# Altium PCB PCB1.PcbDoc
Units mil, origin at the board's own origin, x right, y up, seen from the top; angles counter-clockwise.
Board outline 950 x 1100 mil, 2 copper layers (Top Layer, Bottom Layer); 14 components, 22 nets, 68 pads, 7 vias.
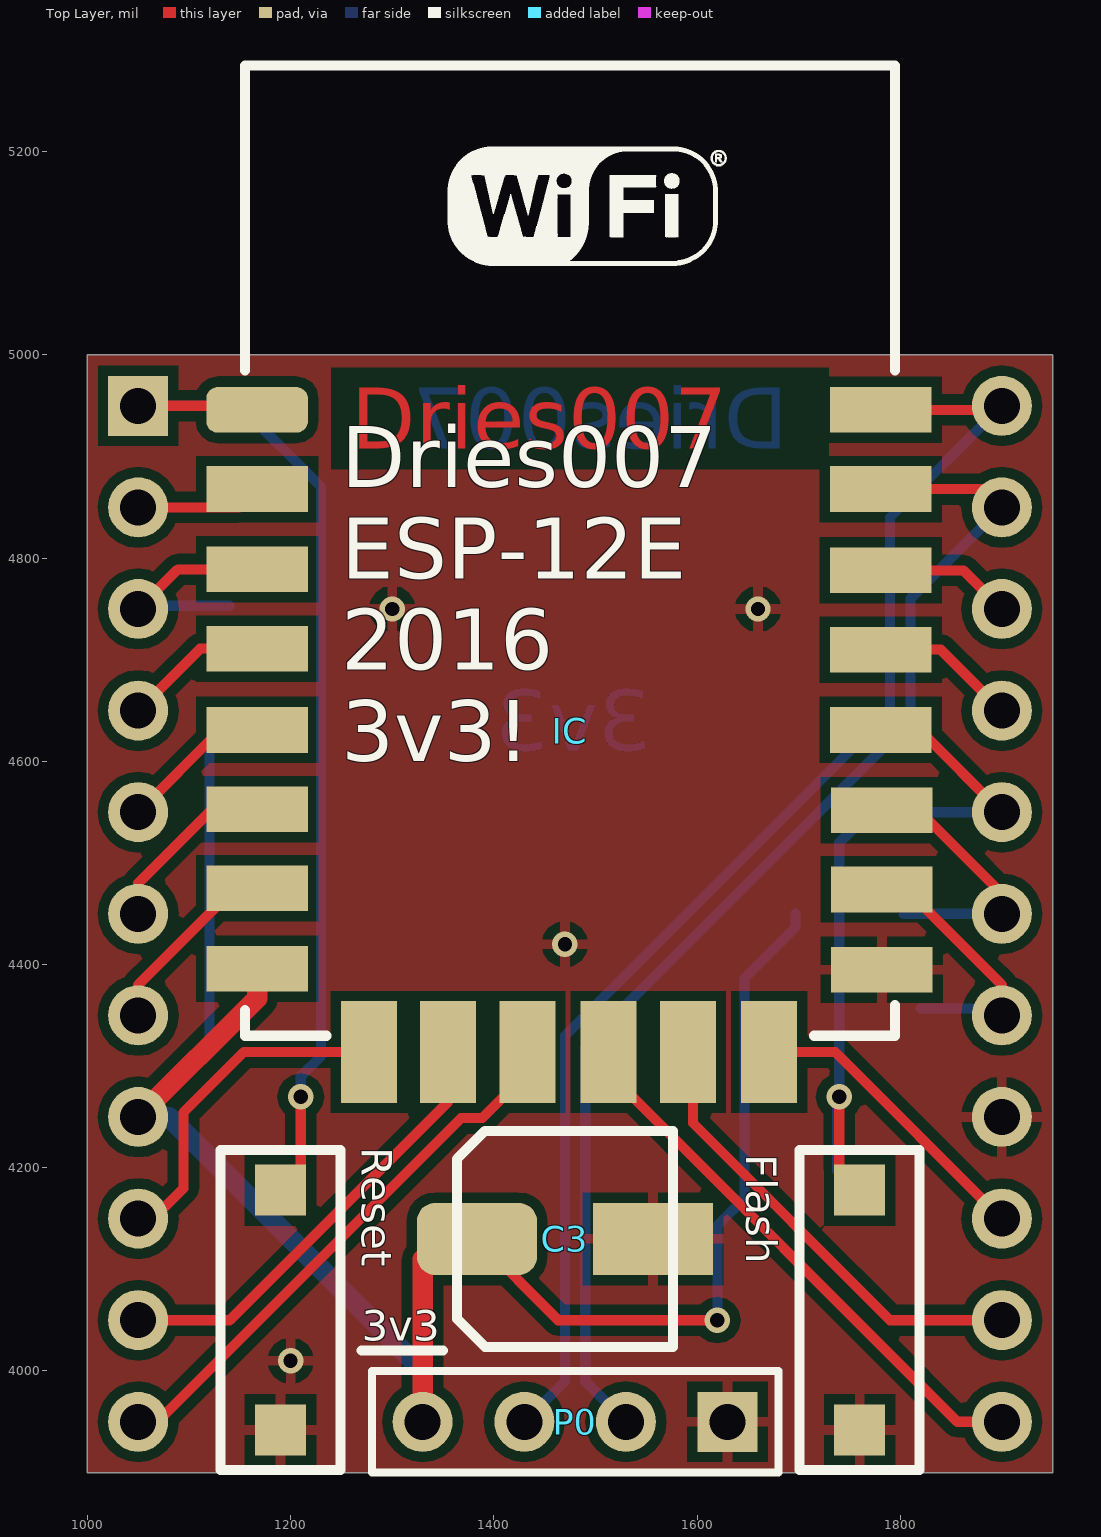
[diagram p0: Top Layer view]
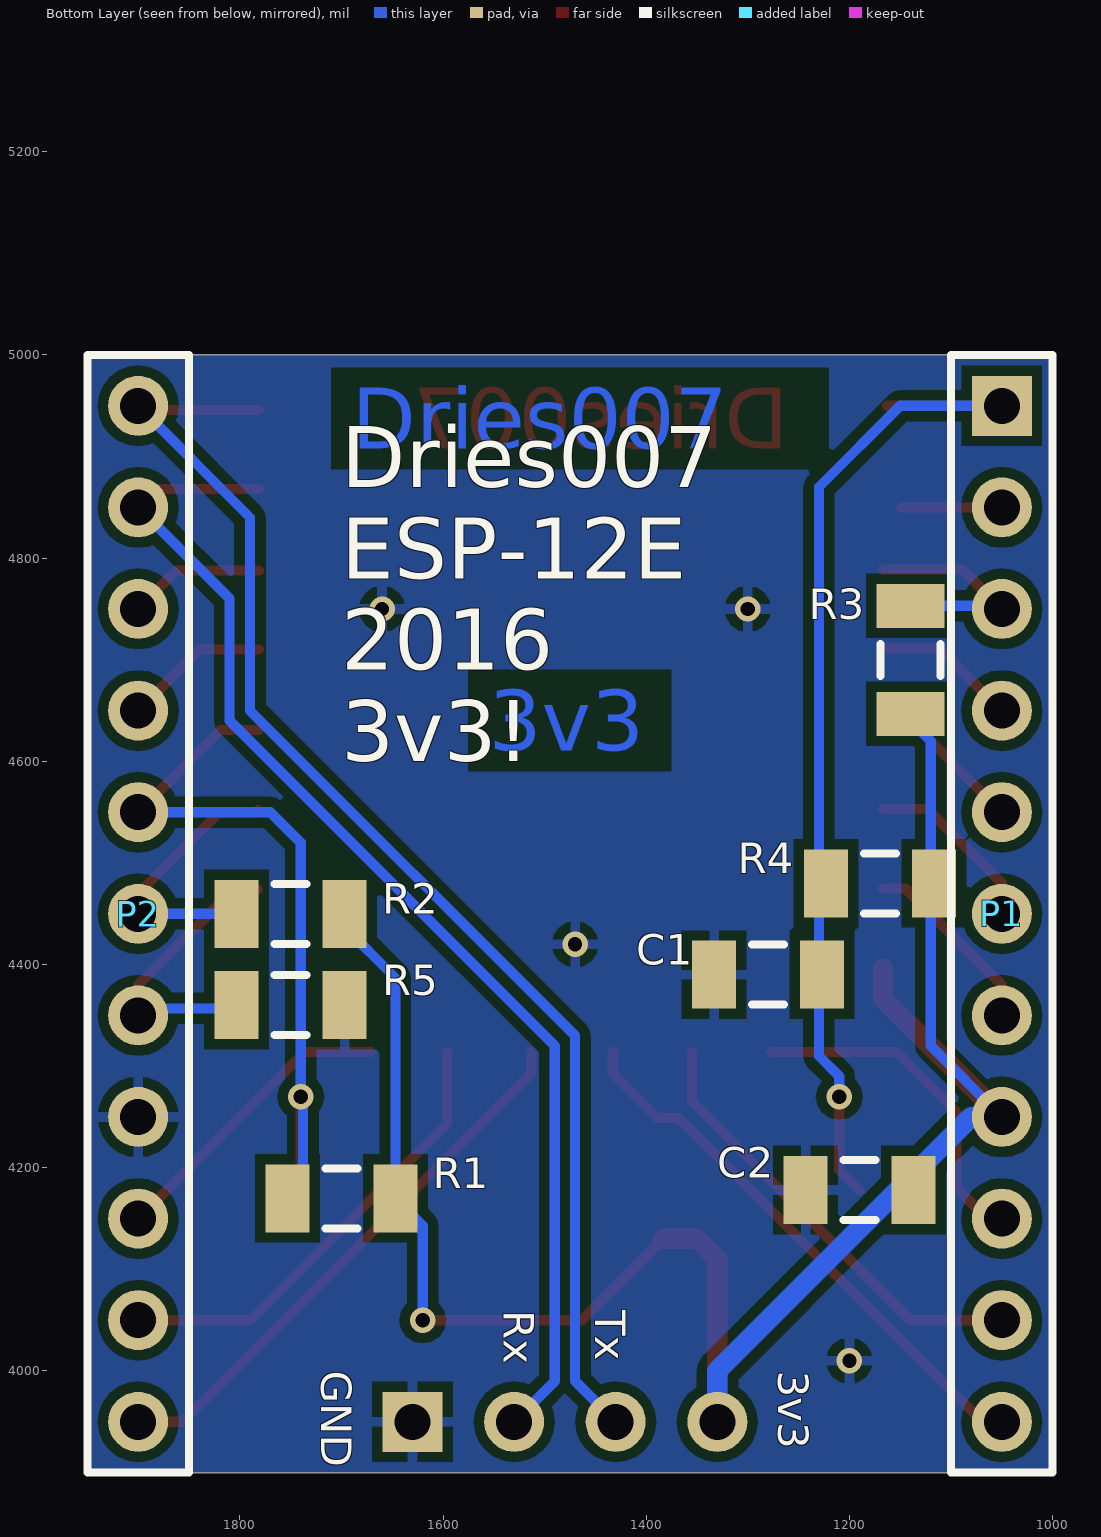
[diagram p1: Bottom Layer view, seen from below]

## Layer stack, top to bottom
Top Solder: solder mask 0.4, Solder Resist, Dk 3.5
Top Layer: signal copper 1.4
Dielectric 1: dielectric 12.6, FR-4, Dk 4.8
Bottom Layer: signal copper 1.4
Bottom Solder: solder mask 0.4, Solder Resist, Dk 3.5

## Board outline
1000,3900 1950,3900 1950,5000 1000,5000

## Design rules (kind name [scope] priority, off if disabled: settings)
Clearance [All] p1: gap=10
PolygonConnect [All] p1: connectstyle=Relief reliefconductorwidth=10 reliefentries=4 polygonreliefangle="90 Angle" airgapwidth=10
RoutingVias [All] p1: holewidth=28 width=50 viastyle="Through Hole" minholewidth=28 minwidth=50 maxholewidth=28 maxwidth=50
SolderMaskExpansion [All] p1: expansion=4
Width [All] p1: maxlimit=100 minlimit=10 preferedwidth=10 minimp=50.000000 maximp=50.000000 favimp=50.000000
30 further rules are at their usual default settings.

## Components (designator, comment, footprint, x,y, rotation, side; value= is the part's Value field where it differs from the comment)
C1 "Cap Semi" C1206 1280,4390 r0 bottom
C2 "Cap Semi" C1206 1190,4178.11 r0 bottom
C3 "" "SMD cap 6x5" 1470,4130 r0 top
Flash "Flash" SMDswitch 1760,4060 r90 top (schematic designator GPIO0)
IC "ESP8266 ESP-12-E" "ESP8266 ESP-12-E" 1820,4300 r0 top
P0 "Serial" HDR1X4 1630,3950 r180 top
P1 "Header 11" HDR1X11#1 1050,4950 r270 bottom
P2 "Header 11" HDR1X11#2 1900,4950 r270 bottom
R1 "Res2" C1206 1700,4170 r180 bottom
R2 "Res2" C1206 1750,4450 r180 bottom
R3 "Res2" C1206 1140,4700 r270 bottom
R4 "Res2" C1206 1170,4480 r180 bottom
R5 "Res2" C1206 1750,4360 r0 bottom
Reset "Reset" SMDswitch 1190,4060 r270 top (schematic designator RST)

## Footprints (in the part's own frame and the unit in brackets; to place one, negate y for a bottom-side part, rotate by r counter-clockwise, add the part's x,y. Pads: shape width x height; smd on the part's side, far side on the other; paste and mask are expansions set on the pad)
C1206 [mm] "Chip Capacitor, Body 3.2x1.6mm, IPC High Density"
  rect 1.1x1.7 smd: 1(-1.35,0) 2(1.35,0)
  silkscreen extent -0.4,-0.75 0.4,0.75, body extent -1.7,-0.9 1.7,0.9, height 1.3
"ESP8266 ESP-12-E" [mil] "ESP8266 ESP-12-E"
  rrect50% 100x45 smd: 1(-653,646)
  rect 100x45 smd: 2(-653,568) 3(-653,489) 4(-653,411) 5(-653,331) 6(-653,253) 7(-653,175) 8(-653,96) 15(-38,95) 16(-38,174) 17(-38,252) 18(-39,331) 19(-39,410) 20(-39,488) 21(-39,568) 22(-39,646)
  rect 55x100 smd: 9(-543,14) 10(-465,14) 11(-387,14) 12(-307,14) 13(-229,14) 14(-149,14)
  silkscreen extent -665,30 -25,985
HDR1X4 [mm] "Connector; Header; 4 Position"
  rect 1.5x1.5 hole 0.9: 1(0,0)
  round 1.5 hole 0.9: 2(2.54,0) 3(5.08,0) 4(7.62,0)
  silkscreen extent -1.27,-1.27 8.89,1.27
HDR1X11#1 [mm] "Connector; Header; 11 Position"
  rect 1.5x1.5 hole 0.9: 1(0,0)
  round 1.5 hole 0.9: 2(2.54,0) 3(5.08,0) 4(7.62,0) 5(10.16,0) 6(12.7,0) 7(15.24,0) 8(17.78,0) 9(20.32,0) 10(22.86,0) 11(25.4,0)
  silkscreen extent -1.27,-1.27 26.67,1.27
HDR1X11#2 [mm] "Connector; Header; 11 Position"
  round 1.5 hole 0.9: 1(0,0) 2(2.54,0) 3(5.08,0) 4(7.62,0) 5(10.16,0) 6(12.7,0) 7(15.24,0) 8(17.78,0) 9(20.32,0) 10(22.86,0) 11(25.4,0)
  silkscreen extent -1.27,-1.27 26.67,1.27
"SMD cap 6x5" [mm]
  rrect50% 3x1.8 smd: 1(-2.2,0)
  rect 3x1.8 smd: 2(2.2,0)
  silkscreen extent -2.7,-2.7 2.7,2.7
SMDswitch [mm]
  rect 1.27x1.27 smd: 1(3,0) 2(-3,0)
  silkscreen extent -4,-1.5 4,1.5

## Part data
C1 C2: "Capacitor (Semiconductor SIM Model)"
C3: library part "Cap Pol1", "Polarized Capacitor (Radial)"
Flash Reset: library part SW-PB, "Switch"
P0: library part "Header 4", "Header, 4-Pin"
P1 P2: "Header, 11-Pin"
R1 R2 R3 R4 R5: "Resistor"

## Via types
v1: diameter 25, hole 14, Top Layer to Bottom Layer, tented both sides, 7 vias

## Nets (pads, with @x,y where several pads share a name; then routed paths per layer and width w, separated by ;. In a path a pad name is that pad's centre, name@x,y a point inside that pad or via, vN(x,y) a via of type N, cw(c..) or ccw(c..) an arc to the next point about the centre after c; other vN are vias at no path point)
GND: C1.2 C2.2 C3.2 Flash.2 IC.15 P0.1 P2.8 R5.1 Reset.1
  other v1: 1200,4010 1470,4420 1300,4750 1660,4750
NetC1_1: C1.1 IC.1 P1.1 R4.1 Reset.2 | length 1034.6
  Top Layer w10: P1.1 IC.1@1163,4950 ; Reset.2 1210,4198.11 v1(1210,4270)
  Bottom Layer w10: P1.1 1150,4950 1230,4870 1230,4310 1210,4290 v1(1210,4270)
NetGPIO0_1: Flash.1 IC.18 P2.5 R1.1 | length 738.3
  Top Layer w10: v1(1740,4270) 1740,4198.11 Flash.1 ; IC.18 1819,4631 P2.5
  Bottom Layer w10: R1.1@1737.86,4196.84 v1@1737.86,4259.99 ; v1(1740,4270) 1740,4520 1770,4550 P2.5
NetIC_2: IC.2 P1.2 | length 99
  Top Layer w10: P1.2 IC.2@1149,4850
NetIC_3: IC.3 P1.3 R3.1 | length 224.5
  Top Layer w10: P1.3 1089,4789 IC.3
  Bottom Layer w10: P1.3 1053.15,4753.15 R3.1
NetIC_4: IC.4 P1.4 | length 142.3
  Top Layer w10: P1.4 1111,4711 IC.4
NetIC_5: IC.5 P1.5 | length 150.6
  Top Layer w10: P1.5 1131,4631 IC.5
NetIC_6: IC.6 P1.6 | length 177.2
  Top Layer w10: P1.6 1050,4480 1123,4553 IC.6
NetIC_7: IC.7 P1.7 | length 186.4
  Top Layer w10: P1.7 1050,4380 1145,4475 IC.7
NetIC_9: IC.9 P1.9 | length 338.6
  Top Layer w10: P1.9 1064.59,4150 1094.53,4179.93 1094.53,4254.53 1154,4314 IC.9
NetIC_10: IC.10 P1.10 | length 443.1
  Top Layer w10: P1.10 1140,4050 1355,4265 IC.10
NetIC_11: IC.11 P1.11 | length 545.9
  Top Layer w10: P1.11 1069,3950 1368,4249 1388.71,4249 1433,4293.29 IC.11
NetIC_12: IC.12 P2.11 | length 549.9
  Top Layer w10: IC.12 1513,4293.29 1856.29,3950 P2.11
NetIC_13: IC.13 P2.10 | length 454.4
  Top Layer w10: IC.13@1596,4314 1596,4244 1790,4050 P2.10
NetIC_14: IC.14 P2.9 | length 296.9
  Top Layer w10: IC.14 1736,4314 P2.9
NetIC_16: IC.16 P2.7 R5.2 | length 260.1
  Top Layer w10: IC.16 1806,4474 1900,4380 P2.7
  Bottom Layer w10: R5.2@1820,4356.85 P2.7@1893.15,4356.85
NetIC_17: IC.17 P2.6 R2.1 | length 268.8
  Top Layer w10: IC.17 1784,4550 1820,4550 1900,4470 P2.6
  Bottom Layer w10: R2.1 P2.6
NetIC_19: IC.19 P2.4 | length 143.9
  Top Layer w10: IC.19 1840,4710 P2.4
NetIC_20: IC.20 P2.3 | length 134.7
  Top Layer w10: IC.20 1862,4788 P2.3
NetIC_21: IC.21 P0.2 P2.2 | length 1212.9
  Top Layer w10: IC.21 1882,4868 P2.2
  Bottom Layer w10: P0.2 1490,3990 1490,4320 1810,4640 1810,4760 P2.2
NetIC_22: IC.22 P0.3 P2.1 | length 1309.7
  Top Layer w10: IC.22 P2.1@1896,4946
  Bottom Layer w10: P0.3 1470,3990 1470,4330 1790,4650 1790,4840 P2.1
VDD: C2.1 C3.1 IC.8 P0.4 P1.8 R1.2 R2.2 R3.2 R4.2 | length 1983.4
  Top Layer w10: C3.1 1463.39,4050 v1(1620,4050)
  Top Layer w20: P1.8 1167,4367 IC.8 ; P0.4 1330,4110 1350,4130 C3.1
  Bottom Layer w10: P1.8 1120,4320 1120,4620 R3.2@1143.43,4643.43 ; v1(1620,4050) 1620,4143.15 R1.2 1646.85,4386.85 1696.85,4436.85 R2.2
  Bottom Layer w20: P1.8 1080,4250 1330,4000 P0.4

## Polygon pours and split planes (outlines as drawn)
GND on Top Layer "Top Layer-No Net" (solid, remove dead copper, pour order 0): 1000,5000 1000,3900 1950,3900 1950,5000
GND on Bottom Layer "AutoNaming" (solid, remove dead copper, pour order 2): 1000,5000 1000,3900 1950,3900 1950,4990 1950,5000

## Other copper
Top Layer:
  text "Dries007" at 1259.84,4907.48 h60
Bottom Layer:
  text "Dries007" at 1689.96,4907.48 h60
  text "3v3" at 1555.12,4610.24 h60

## Silkscreen, mask and mechanical layers (free items; w line width, h text height)
Top Overlay:
  lines w10: 1270,4020 1350,4020
  text "Dries007 / ESP-12E / 2016 / 3v3!" at 1250,4600 h60
  text "3v3" at 1270,4030 h30
Bottom Overlay:
  text "Dries007 / ESP-12E / 2016 / 3v3!" at 1700,4600 h60
  text "Tx" at 1450,4060 h30 r90
  text "Rx" at 1540,4060 h30 r90
  text "3v3" at 1270,4000 h30 r90
  text "GND" at 1720,4000 h30 r90
Mechanical 1:
  the board outline again, w10

## Panel: embedded boards
"" at 1390,1350, 1 rows x 2 columns, spacing 1968.5 x 1968.5, rotation 0

## Text inside footprints (layer, text, board x,y; h text height)
IC: Mechanical 13 "ANTENNA AREA" at 1167.04,5260.59 h10; Mechanical 13 "CUTOUT POLYGON" at 1167.04,5240.59 h10